# EAGLE board mpu6050_1l (EAGLE 5.11)
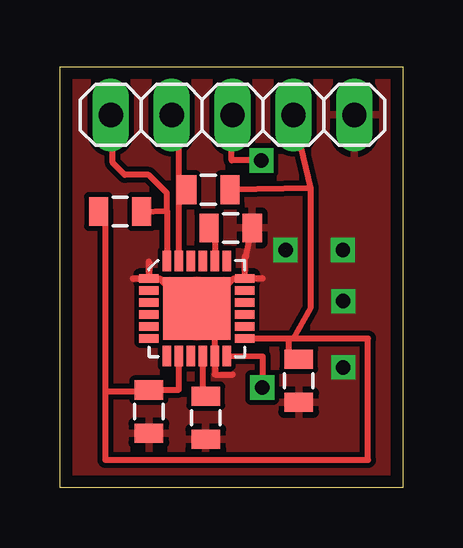
[diagram p0: board, top side]
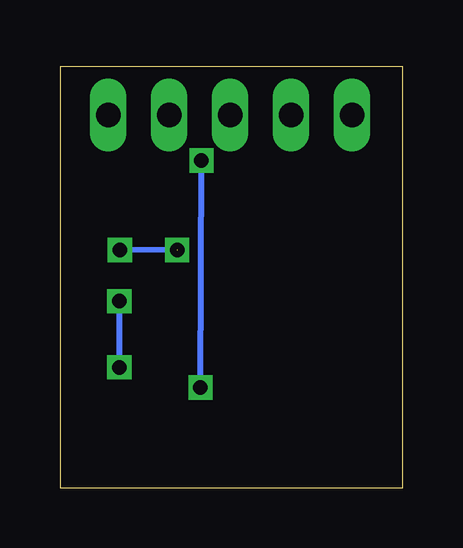
[diagram p1: board, bottom side, seen from below]

Size 14.3 x 17.53 mm. Coordinates in mm from the lower left corner, seen from the top.
Outline: 0,17.53 14.3,17.53 14.3,0 0,0 0,17.53
Copper layers (1*16): Top 0.035mm / dielectric 1.5mm / Bottom 0.035mm
Design rules "default *": minimum track width 10mil, minimum drill 0.4mm, track to track 8mil, track to pad 8mil, pad to pad 8mil, via to via 8mil, smd to smd 8mil, copper to edge 20mil, drill to drill 8mil, minimum pad ring 10mil, minimum via ring 8mil, stop-mask expansion 4mil, vias tented up to drill 0.6mm, thermal gap 10mil

## Footprints (pad centres in the part's own frame; a part is rotated, then mirrored left to right if it is on the bottom)
0805 = smd 0.8 x 1.2: 1 -0.9,0; 2 0.9,0
QFN24 = smd 0.8 x 0.35: 1 -2,1.25; 2 -2,0.75; 3 -2,0.25; 4 -2,-0.25; 5 -2,-0.75; 6 -2,-1.25; 13 2,-1.25; 14 2,-0.75; 15 2,-0.25; 16 2,0.25; 17 2,0.75; 18 2,1.25 | smd 0.35 x 0.85: 7 -1.25,-1.975; 8 -0.75,-1.975; 9 -0.25,-1.975; 10 0.25,-1.975; 11 0.75,-1.975; 12 1.25,-1.975; 19 1.25,1.975; 20 0.75,1.975; 21 0.25,1.975; 22 -0.25,1.975; 23 -0.75,1.975; 24 -1.25,1.975 | smd 2.8 x 2.6: P 0,0
1X05 = drill 1.016 long: 1 -5.08,0; 2 -2.54,0; 3 0,0; 4 2.54,0; 5 5.08,0

## Placement (x,y rotation side)
C1  [0805]  6.08,2.91 90 top
C2  [0805]  3.71,3.17 90 top
C3  [0805]  9.96,4.45 270 top
C4  [0805]  7.12,10.82 0 top
IC1  MPU-6050  [QFN24]  5.71,7.46 0 top
JP1  [1X05]  7.2,15.53 180 top
R1  [0805]  6.19,12.41 0 top
R2  [0805]  2.51,11.5 180 top

## Library data of the parts
C1-C4 R1 R2 = SparkFun
IC1 = seb
JP1 = pinhead-2

## Nets
+3V3: C2.2 C3.1 IC1.8 IC1.13 JP1.2 R1.2 R2.2
GND: C1.1 C2.1 C3.2 C4.2 IC1.1 IC1.11 IC1.18 IC1.P JP1.1
INT: IC1.12 JP1.3
N$2: C1.2 IC1.10
N$3: C4.1 IC1.20
SCL: IC1.23 JP1.4 R1.1
SDA: IC1.24 JP1.5 R2.1

## Tracks (layer width: path | path; a pad name or v marks a point on that pad's centre or on a via)
+3V3
  Top 0.254: IC1.8 4.96,4.08 C2.2 3.2,4.03 3.2,4.01 1.9,4.01 | 10.46,12.48 10.46,7.5 9.74,6.21 | 10.46,12.48 JP1.2 | R2.2 1.9,11.53 1.9,10.23 1.9,5.33 1.9,4.01 | 10.46,12.48 R1.2 | 9.74,6.21 9.54,6.21 | 9.54,6.21 IC1.13 | C3.1 9.54,5.59 9.54,6.21 | 1.9,4.01 1.9,1.15 12.85,1.15 12.85,6.21 9.74,6.21
GND  (via drill 0.6)  (1 unrouted)
  Top 0.254: 3.28,8.7 3.06,8.7 3.04,8.72 | 3.28,8.7 3.45,8.7 | 8.45,8.72 8.44,8.73 7.96,8.73 7.71,8.73 | 7.2,4.71 6.46,4.71 IC1.11 6.46,7.46 IC1.P | IC1.P 6.53,8.28 6.81,8.28 7.24,8.71 IC1.18 7.71,8.73 | IC1.P 5.13,8.04 4.83,8.04 4.16,8.71 IC1.1 3.71,9.41 IC1.1 3.28,8.7 | 7.71,8.73 7.71,9.62 7.77,9.62 C4.2
  Bottom 0.254: v11.82,5.01 v11.82,7.77 | v9.4,9.9 v11.79,9.89
  pour Top: 0,17.53 14.09,17.51 14.19,-0.44 0.1,-0.42
INT  (via drill 0.6)
  Top 0.254: JP1.3 7.16,13.63 v8.4,13.63 | v8.44,4.17 8.45,5.46 IC1.12
  Bottom 0.254: v8.4,13.63 v8.44,4.18 v8.44,4.17
N$2
  Top 0.254: C1.2 5.96,3.98 IC1.10
N$3
  Top 0.254: IC1.20 6.46,10.8 C4.1
S$1
  Top 0.254: 6.5,5.53 6.46,5.53 6.46,6.64
S$2
  Top 0.254: 7.72,8.7 7.24,8.7 6.92,8.38
S$3
  Top 0.254: 3.76,8.69 4.2,8.69 4.51,8.38
SCL
  Top 0.254: IC1.23 4.96,12.23 | 4.96,12.23 R1.1 | JP1.4 4.96,15.53 4.96,12.23
SDA
  Top 0.254: 4.46,11.53 IC1.24 | R2.1 4.46,11.53 | JP1.5 2.2,15.53 2.2,13.53 2.7,13.03 3.7,13.03 4.46,12.27 4.46,11.53